# Altium PCB PCB1.PcbDoc
Units mm, origin at the board's own origin, x right, y up, seen from the top; angles counter-clockwise.
Board outline 50.13 x 49.75 mm, 2 copper layers (Top Layer, Bottom Layer); 16 components, 11 nets, 36 pads, 0 vias.
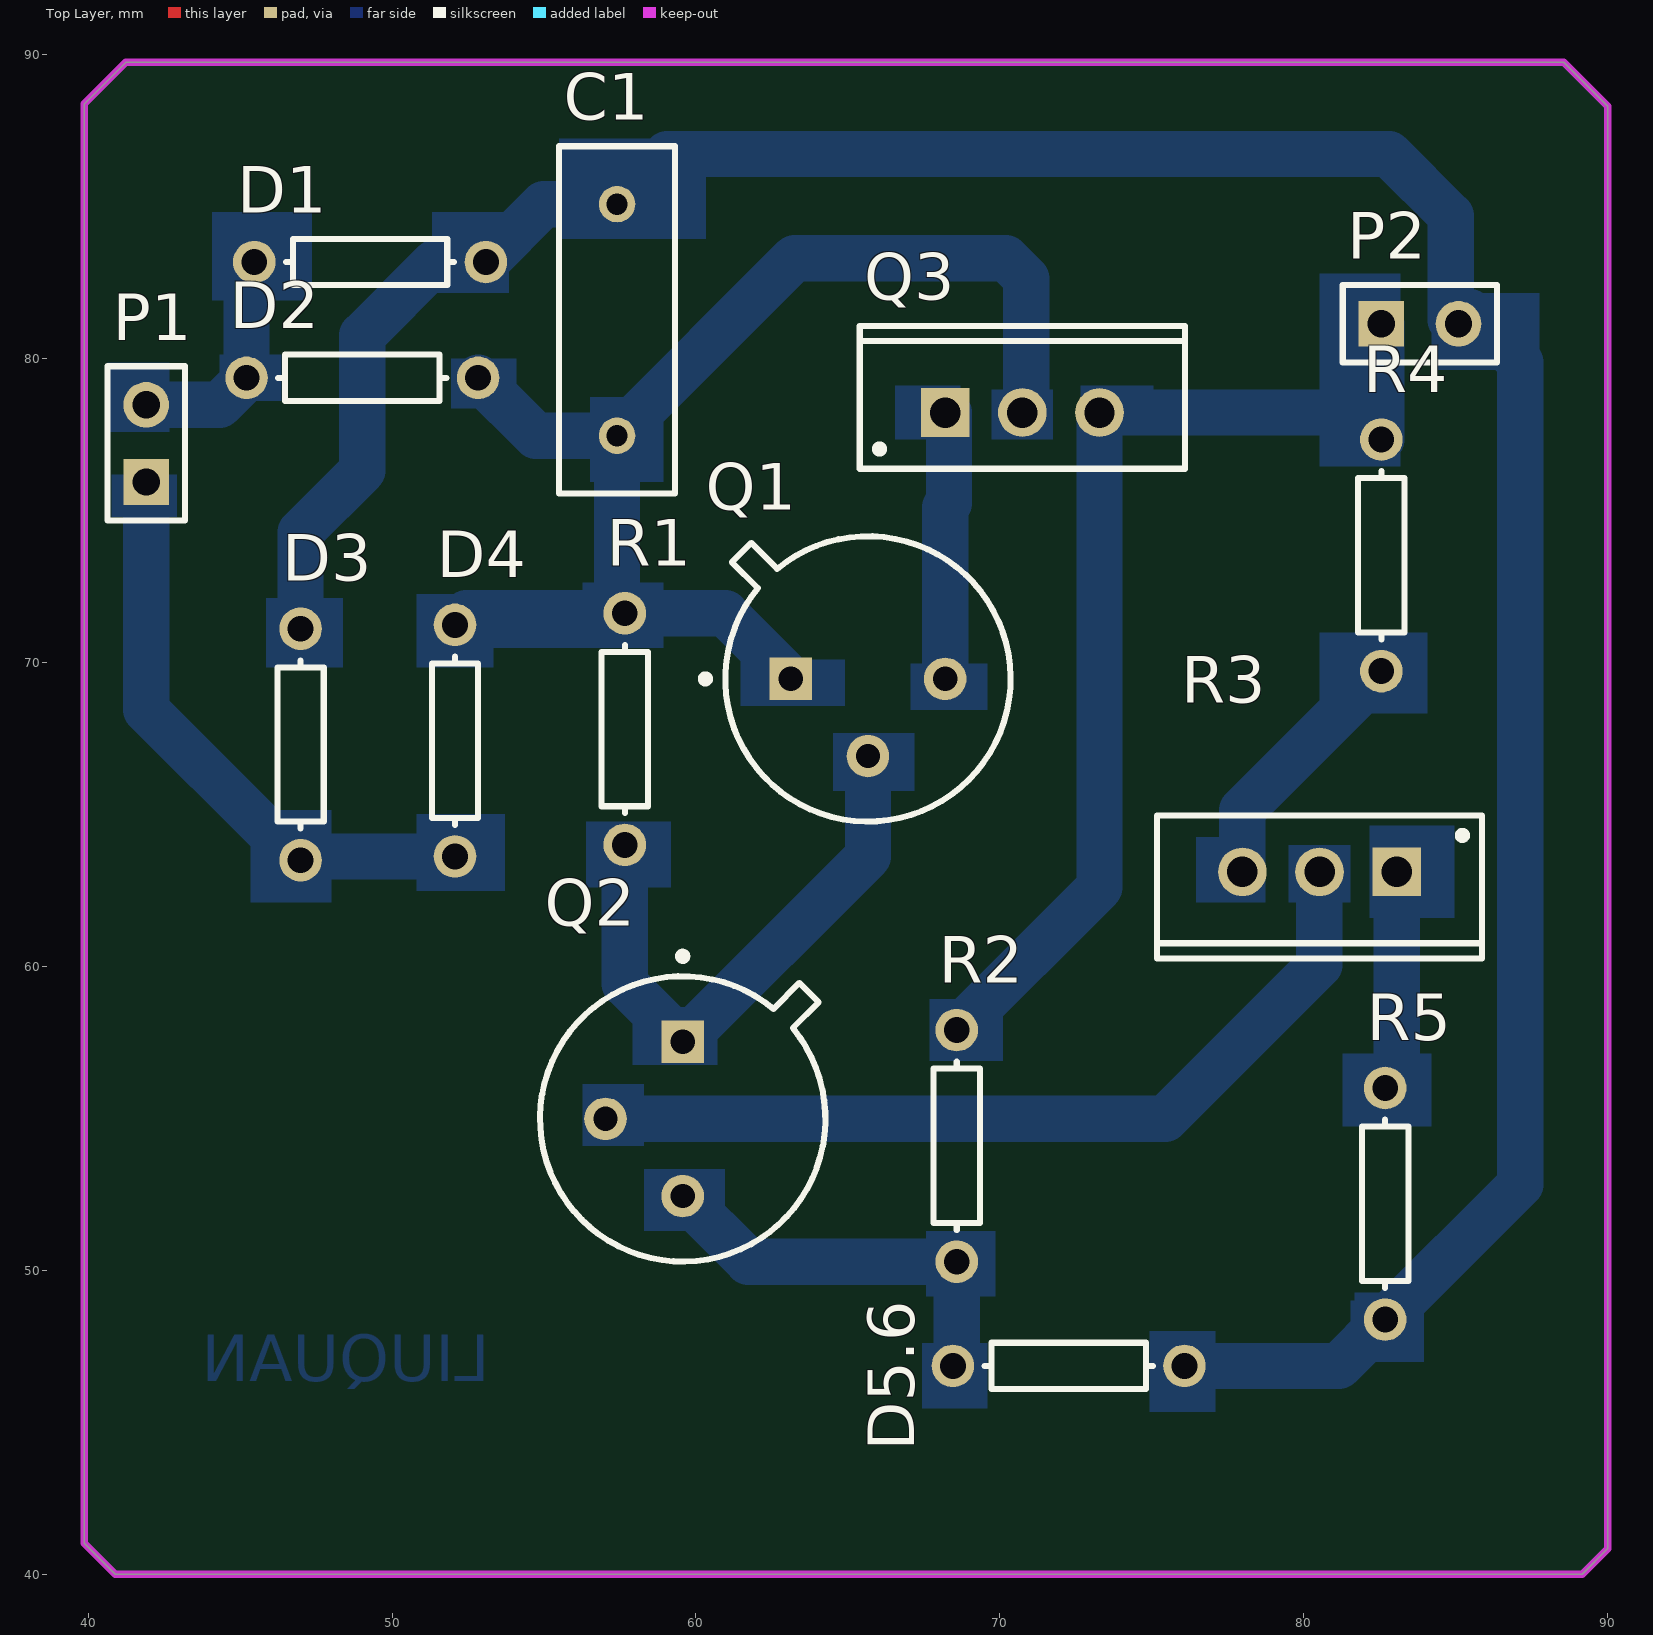
[diagram p0: Top Layer view]
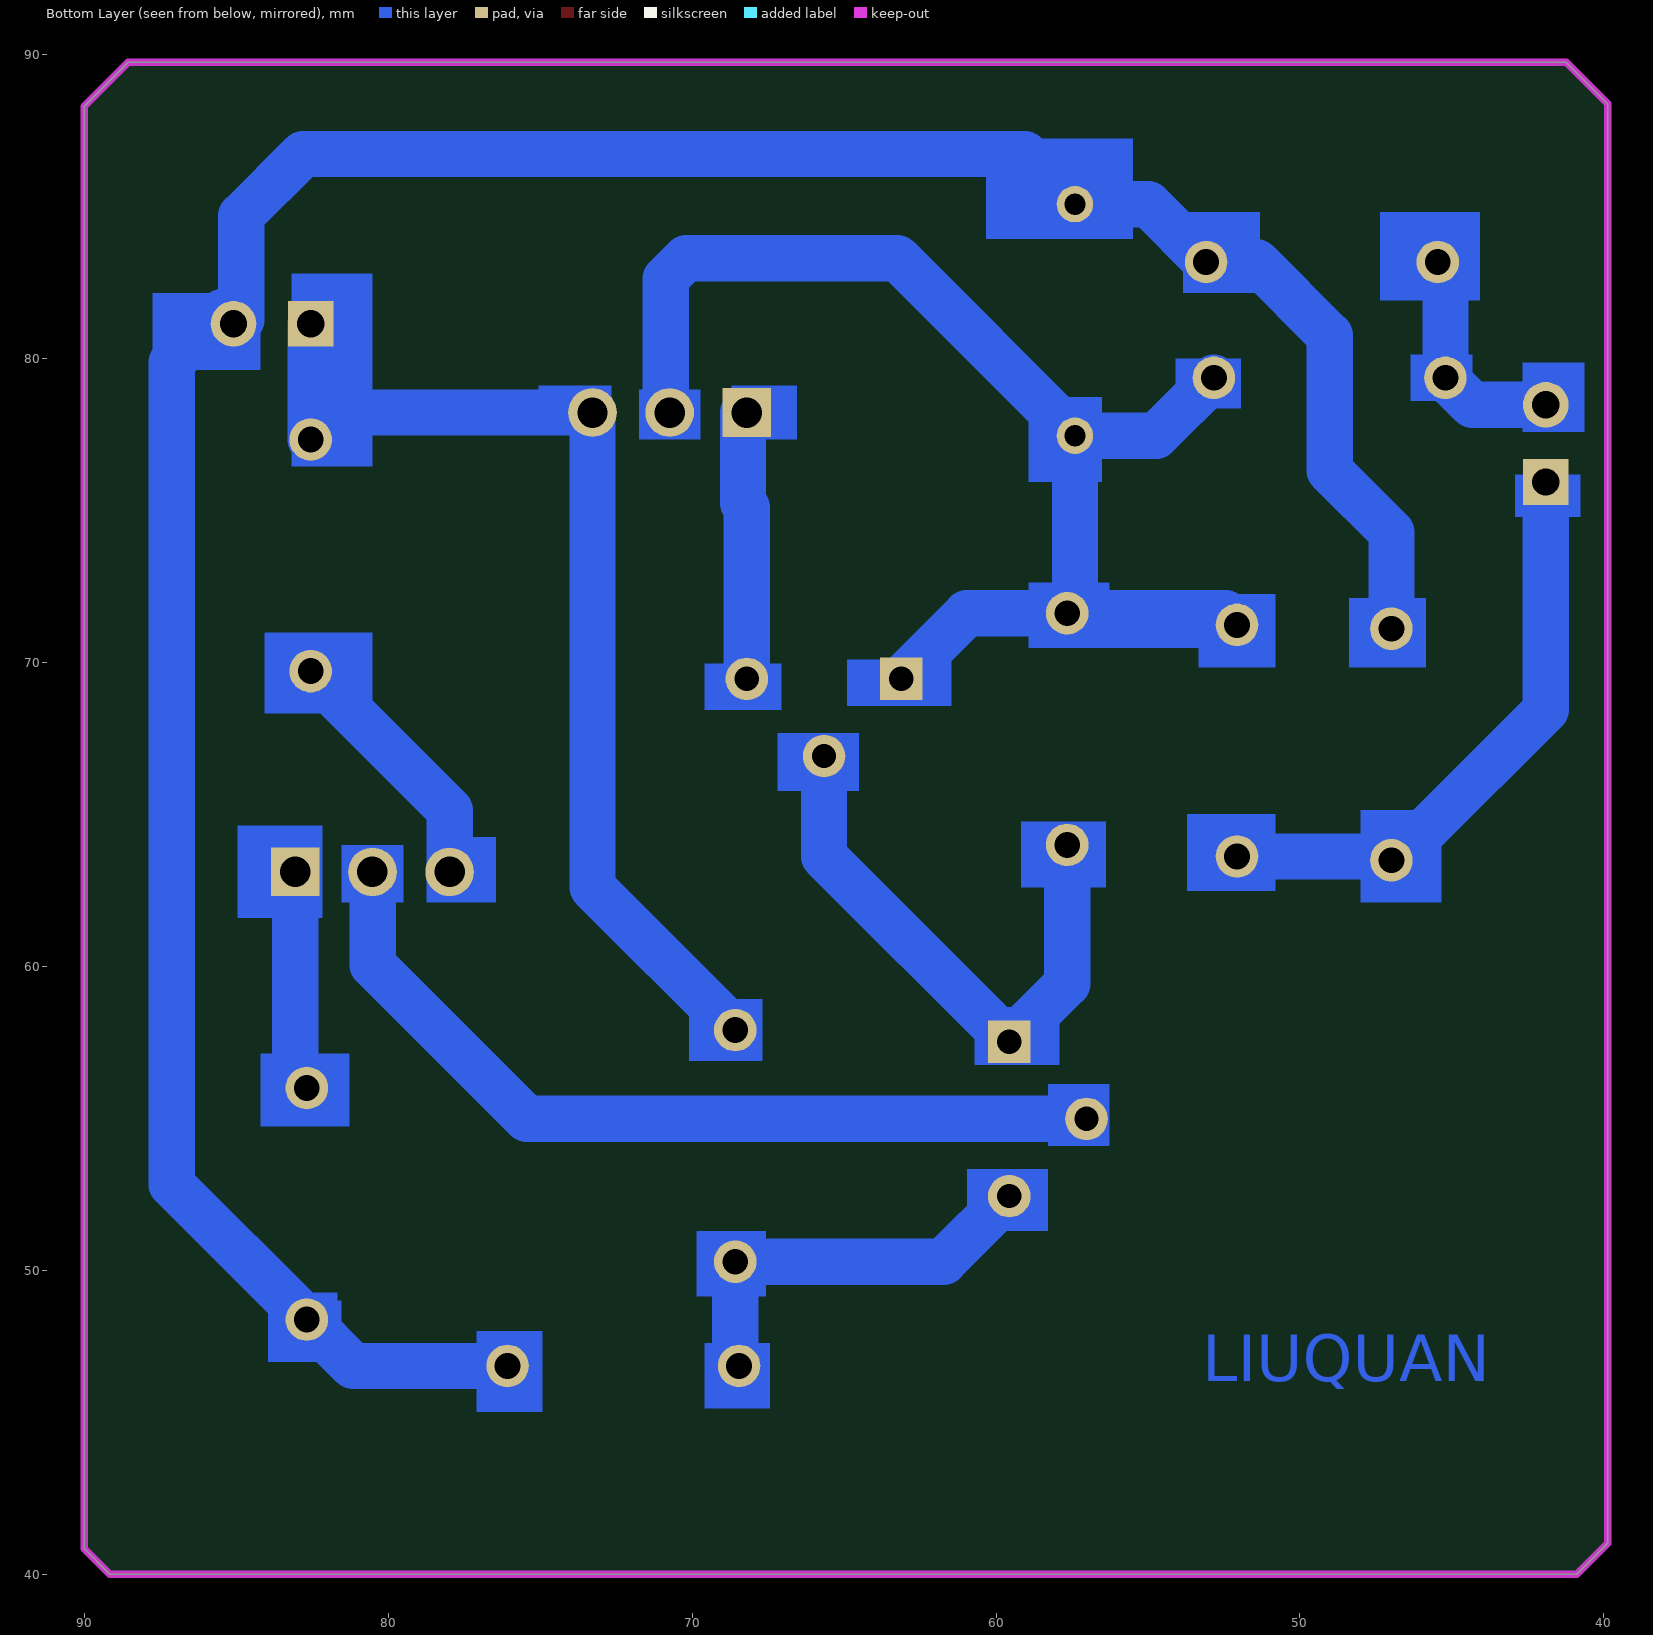
[diagram p1: Bottom Layer view, seen from below]

## Layer stack, top to bottom
Top Solder: solder mask 0.0102, Solder Resist, Dk 3.5
Top Layer: signal copper 0.0356
Dielectric 1: dielectric 0.32, FR-4, Dk 4.8
Bottom Layer: signal copper 0.0356
Bottom Solder: solder mask 0.0102, Solder Resist, Dk 3.5

## Board outline
40.889,40.01 39.873,41.026 39.873,88.387 41.243,89.757 88.551,89.757 89.999,88.309 89.999,40.85 89.159,40.01
cut-out: 44.45,98.679

## Design rules (kind name [scope] priority, off if disabled: settings)
Clearance [All] p1: gap=0.254 ignorepadtopadclearanceinfootprint=FALSE except(0: Arc-Hole Track-Hole SMDPad-Hole THPad-Hole Via-Hole Fill-Hole Poly-Hole Region-Hole Text-Hole)
PolygonConnect [All] p1: connectstyle=Relief reliefconductorwidth=0.254 reliefentries=4 polygonreliefangle="90 Angle" airgapwidth=0.254
RoutingVias [All] p1: holewidth=0.711 width=1.27 viastyle="Through Hole" minholewidth=0.711 minwidth=1.27 maxholewidth=0.711 maxwidth=1.27
SolderMaskExpansion [All] p1: expansion=0.102
Width [All] p1: maxlimit=2.032 minlimit=1.016 preferedwidth=1.524
30 further rules are at their usual default settings.

## Components (designator, comment, footprint, x,y, rotation, side; value= is the part's Value field where it differs from the comment)
C1 "Cap" RAD-0.3 57.404,81.28 r270 top value=100pF
D1 "Diode 1N4007" AXIAL-0.3 49.276,83.185 r180 top
D2 "Diode 1N4007" AXIAL-0.3 49.022,79.375 r0 top
D3 "Diode 1N4007" AXIAL-0.3 46.99,67.31 r270 top
D4 "Diode 1N4007" AXIAL-0.3 52.07,67.437 r90 top
D5.6 "Diode 1N5406" AXIAL-0.3 72.263,46.863 r180 top
P1 "Header 2" HDR1X2 41.91,75.946 r90 top
P2 "Header 2" HDR1X2 82.55,81.153 r0 top
Q1 "2N2222" TO-39 65.659,69.469 r0 top
Q2 "2N2222" TO-39 59.563,54.991 r270 top
Q3 "TIP41A" TO-220AB 70.739,78.232 r0 top
R1 "Res1" AXIAL-0.3 57.658,67.818 r90 top value=1K
R2 "Res1" AXIAL-0.3 68.58,54.102 r90 top value=1K
R3 "Res Tap" TO-220AB 80.518,63.119 r180 top value=500
R4 "Res1" AXIAL-0.3 82.55,73.533 r90 top value=400
R5 "Res1" AXIAL-0.3 82.677,52.197 r90 top value=200

## Footprints (in the part's own frame and the unit in brackets; to place one, negate y for a bottom-side part, rotate by r counter-clockwise, add the part's x,y. Pads: shape width x height; smd on the part's side, far side on the other; paste and mask are expansions set on the pad)
AXIAL-0.3 [mm] "Axial Device, Thru-Hole; 2 Leads; 0.3 in Pin Spacing"
  round 1.4 hole 0.85: 1(-3.81,0) 2(3.81,0)
  silkscreen extent -2.77,-0.76 2.77,0.76
HDR1X2 [mm] "Connector; Header; 2 Position"
  rect 1.5x1.5 hole 0.9: 1(0,0)
  round 1.5 hole 0.9: 2(2.54,0)
  silkscreen extent -1.27,-1.27 3.81,1.27
RAD-0.3 [mm] "Radial Cap, Thru-Hole; 2 Leads; 0.3 in Pin Spacing"
  round 1.2 hole 0.7: 1(-3.81,0) 2(3.81,0)
  silkscreen extent -5.71,-1.91 5.71,1.91
TO-39 [mm] "Can; 3 Leads; Pin Circle Dia. 5.08 mm; Lead Dia. 0.48 mm (max)"
  rect 1.4x1.4 hole 0.8: 1(-2.54,0)
  round 1.4 hole 0.8: 2(0,-2.54) 3(2.54,0)
  silkscreen extent -5.47,-4.69 4.69,4.69, body extent -4.69,-4.69 4.69,4.69, height 4.55
TO-220AB [mm] "TO, Thru-Hole, Vertical, Heatsink Mounted; 3 In-Line Leads; Pitch 2.54 mm"
  rect 1.6x1.6 hole 1: 1(-2.54,0)
  round 1.6 hole 1: 2(0,0) 3(2.54,0)
  silkscreen extent -5.35,-1.85 5.35,2.85, body extent -5.4,-1.9 5.4,2.9, height 19.3

## Part data
C1: "Capacitor", LatestRevisionDate=17-Jul-2002, LatestRevisionNote="Re-released for DXP Platform.", PackageDescription="Radial Cap, Thru-Hole; 2 Leads; 0.3 in Pin Spacing", PackageReference=RAD-0.3, Published=8-Jun-2000, Publisher="Altium Limited"
D1 D2 D3 D4: "1 Amp General Purpose Rectifier", Code_JEDEC=DO-204-AL, ComponentLink1Description="Manufacturer Link", ComponentLink1URL=http://www.fairchildsemi.com/, ComponentLink2Description=Datasheet, ComponentLink2URL=http://www.fairchildsemi.com/ds/1N%2F1N4001.pdf, DatasheetVersion=1998, LatestRevisionDate=17-Jul-2002, LatestRevisionNote="Re-released for DXP Platform.", PackageDescription="Diode, Axial; Body 5.2 x 2.7 mm (LxDia. max), Lead Dia. 0.86 mm (max)", PackageReference=DO-41, PackageVersion=Aug-1999, Published=8-Jun-2000, Publisher="Altium Limited"
D5.6: "3 Amp General Purpose Rectifier", ComponentLink1Description="Manufacturer Link", ComponentLink1URL=http://www.fairchildsemi.com/, ComponentLink2Description=Datasheet, ComponentLink2URL=http://www.fairchildsemi.com/ds/1N%2F1N5400.pdf, DatasheetVersion=1998, LatestRevisionDate=17-Jul-2002, LatestRevisionNote="Re-released for DXP Platform.", PackageDescription="Diode, Axial; Body 9.5 x 5.6 mm (LxDia. max), Lead Dia. 1.32 mm (max)", PackageReference=DO-201AD, PackageVersion=Aug-1999, Published=8-Jun-2000, Publisher="Altium Limited"
P1 P2: "Header, 2-Pin", LatestRevisionDate=17-Jul-2002, LatestRevisionNote="Re-released for DXP Platform.", Publisher="Altium Limited"
Q1 Q2 Q3: library part NPN, "NPN Bipolar Transistor", Code_JEDEC=TO-226-AA, LatestRevisionDate=17-Jul-2002, LatestRevisionNote="Re-released for DXP Platform.", PackageDescription="TO, Flat Index; 3 In-Line, Axial Leads; Body Dia. 4.8mm; Leads 0.55 x 0.51 mm (max)", PackageReference=TO-226-AA, Published=8-Jun-2000, Publisher="Altium Limited"
R1 R2 R4 R5: "Resistor", LatestRevisionDate=17-Jul-2002, LatestRevisionNote="Re-released for DXP Platform.", PackageDescription="Axial Device, Thru-Hole; 2 Leads; 0.3 in Pin Spacing", PackageReference=AXIAL-0.3, Published=8-Jun-2000, Publisher="Altium Limited"
R3: "Tapped Resistor", LatestRevisionDate=17-Jul-2002, LatestRevisionNote="Re-released for DXP Platform.", PackageDescription="Variable Resistor, Thru-Hole; 3 Leads", PackageReference=VR3, Published=24-Mar-1999, Publisher="Altium Limited", Set Position=0.5, Sim Note="Enter the Resistance value and the set point into parameter fields."

## Nets (pads, with @x,y where several pads share a name; then routed paths per layer and width w, separated by ;. In a path a pad name is that pad's centre, name@x,y a point inside that pad or via, vN(x,y) a via of type N, cw(c..) or ccw(c..) an arc to the next point about the centre after c; other vN are vias at no path point)
NetC1_1: C1.1 D1.1 D3.1 D5.6.1 P2.2 R5.1 | length 96
  Bottom Layer w1.524: D3.1 46.99,74.295 49.022,76.327 49.022,80.772 51.435,83.185 D1.1 54.991,85.09 C1.1 59.055,86.741 82.804,86.741 84.836,84.709 P2.2@84.836,81.28 ; D5.6.1 81.153,46.863 R5.1 87.122,52.832 87.122,79.883 P2.2@85.471,81.534
NetC1_2: C1.2 D2.2 D4.2 Q1.1 Q3.2 R1.2 | length 49.6
  Bottom Layer w1.524: D2.2 54.737,77.47 C1.2 ; Q1.1 60.96,71.628 R1.2 R1.2@57.404,71.628 ; Q3.2@70.866,78.232 70.866,82.639 70.193,83.312 63.246,83.312 C1.2 ; R1.2@57.404,71.628 52.451,71.628 D4.2 57.404,71.247 R1.2@57.404,71.628 ; R1.2@57.404,71.628 C1.2
NetD1_2: D1.2 D2.1 P1.2 | length 7.6
  Bottom Layer w1.524: P1.2 44.323,78.486 D2.1 45.212,82.931 D1.2
NetD3_2: D3.2 D4.1 P1.1 | length 19.4
  Bottom Layer w1.524: P1.1 41.91,68.453 45.974,64.389 ; 46.038,64.325 D3.2@46.736,63.627 ; D3.2 47.117,63.627 D4.1
NetD5.6_2: D5.6.2 Q2.3 R2.1 | length 13.4
  Bottom Layer w1.524: Q2.3 61.722,50.292 R2.1 68.58,46.99 D5.6.2
NetP2_1: P2.1 Q3.3 R2.2 R4.2 | length 34.5
  Bottom Layer w1.524: R2.2 73.279,62.611 Q3.3 81.661,78.232 ; R4.2 P2.1
NetQ1_2: Q1.2 Q2.1 R1.1 | length 19.2
  Bottom Layer w1.524: R1.1 57.658,59.436 Q2.1 65.659,63.627 Q1.2
NetQ1_3: Q1.3 Q3.1 | length 8.8
  Bottom Layer w1.524: Q1.3 68.199,75.12 68.326,75.248 Q3.1@68.326,78.232
NetQ2_2: Q2.2 R3.2 | length 28.6
  Bottom Layer w1.524: Q2.2 75.438,54.991 80.503,60.056 80.503,63.104 R3.2
NetR3_1: R3.1 R5.2 | length 7.3
  Bottom Layer w1.524: R5.2 83.058,56.388 R3.1
NetR3_2: R3.3 R4.1 | length 8.5
  Bottom Layer w1.524: R3.3 77.978,65.151 R4.1

## Keep-outs
Keep-Out Layer:
  the board outline again, w0.254

## Other copper
Bottom Layer:
  rectangle net NetC1_1: 81.661,48.387 83.82,49.276
  rectangle net NetC1_1: 81.534,46.99 83.947,49.022
  rectangle net NetC1_1: 74.93,45.339 77.089,48.006
  rectangle net NetD5.6_2: 67.437,45.466 69.596,47.625
  rectangle net NetD5.6_2: 67.564,49.149 69.85,51.308
  rectangle net NetP2_1: 67.691,56.896 70.104,58.928
  rectangle net NetD5.6_2: 58.293,51.308 60.96,53.34
  rectangle net NetQ2_2: 56.261,54.102 58.293,56.134
  rectangle net NetQ1_2: 57.912,56.769 60.706,58.674
  rectangle net NetQ1_2: 56.388,62.611 59.182,64.77
  rectangle net NetD3_2: 45.339,62.103 48.006,65.151
  rectangle net NetD3_2: 50.8,62.484 53.721,65.024
  rectangle net NetC1_2: 56.261,70.485 58.928,72.644
  rectangle net NetC1_2: 56.515,75.946 58.928,78.74
  rectangle net NetC1_2: 50.8,69.85 53.34,72.263
  rectangle net NetC1_1: 45.847,69.85 48.387,72.136
  rectangle net NetD3_2: 40.767,74.803 42.926,76.2
  rectangle net NetC1_2: 51.943,78.359 54.102,80.01
  rectangle net NetD1_2: 44.323,78.613 46.355,80.137
  rectangle net NetD1_2: 40.64,77.597 42.672,79.883
  rectangle net NetD1_2: 44.069,81.915 47.371,84.836
  rectangle net NetC1_1: 51.308,82.169 53.848,84.836
  rectangle net NetC1_1: 55.499,83.947 60.325,87.249
  rectangle net NetQ1_2: 64.516,65.786 67.183,67.691
  rectangle net NetC1_2: 61.468,68.58 64.897,70.104
  rectangle net NetQ1_3: 67.056,68.453 69.596,69.977
  rectangle net NetQ1_3: 66.548,77.343 68.707,79.121
  rectangle net NetC1_2: 69.723,77.343 71.755,78.994
  rectangle net NetP2_1: 72.644,77.724 75.057,79.121
  rectangle net NetP2_1: 80.518,76.454 83.185,82.804
  rectangle net NetC1_1: 84.201,79.629 87.757,82.169
  rectangle net NetR3_1: 81.28,54.737 84.201,57.15
  rectangle net NetQ2_2: 79.502,62.103 81.534,64.008
  rectangle net NetR3_1: 82.169,61.595 84.963,64.643
  rectangle net NetR3_2: 76.454,62.103 78.74,64.262
  rectangle net NetR3_2: 80.518,68.326 84.074,70.993
  text "LIUQUAN" at 53.213,46.355 h1.52